# Allegro board CHOPPING_WAVE_OSC3.brd
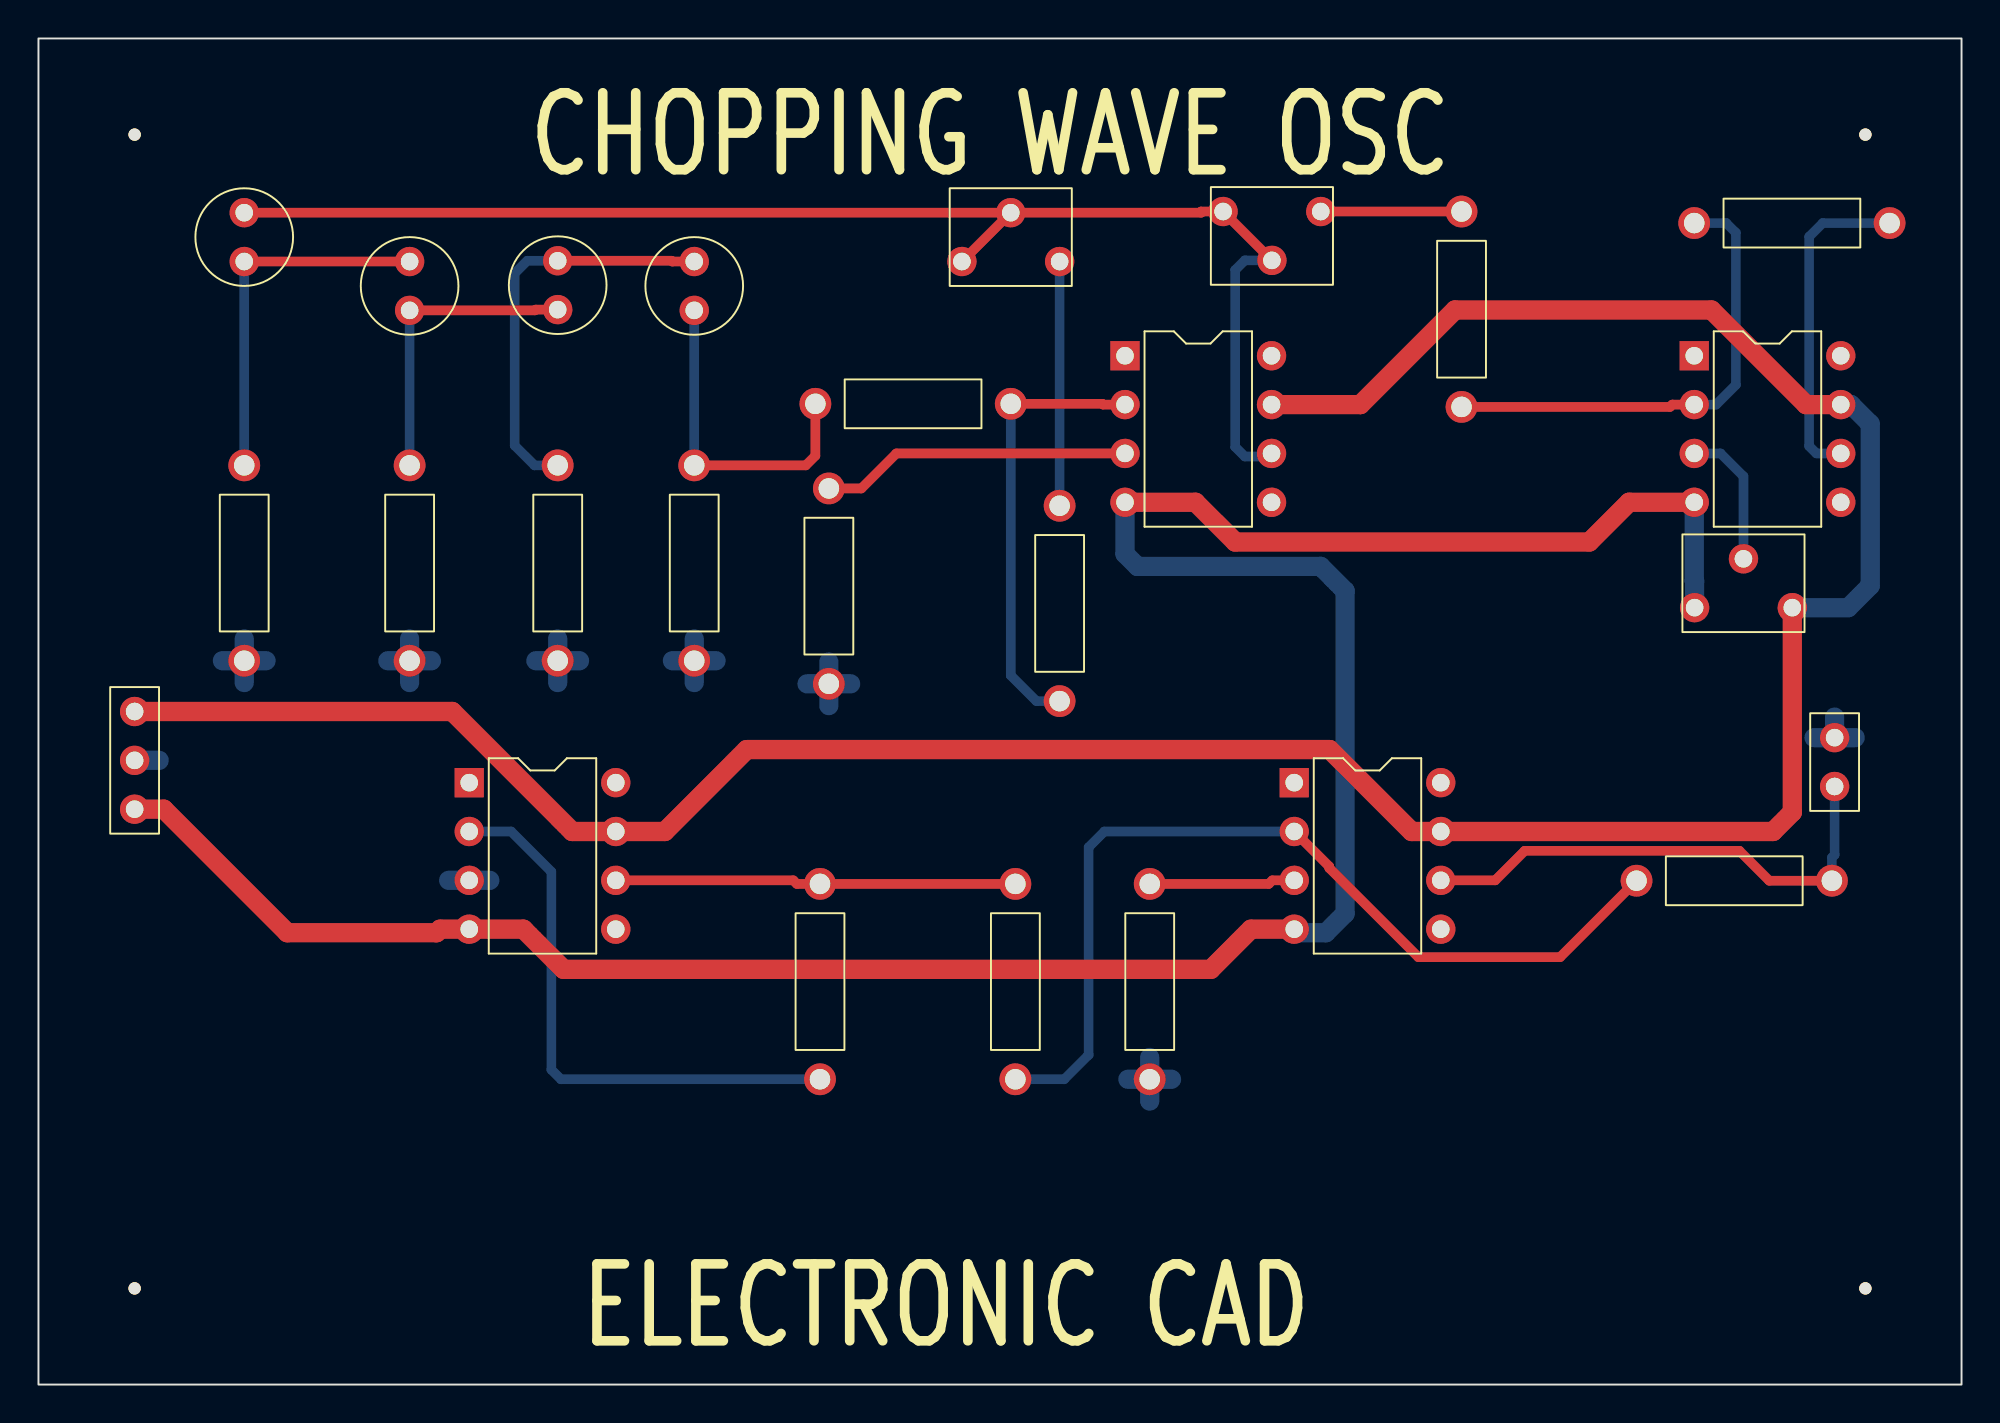
[diagram p0: board, top side]
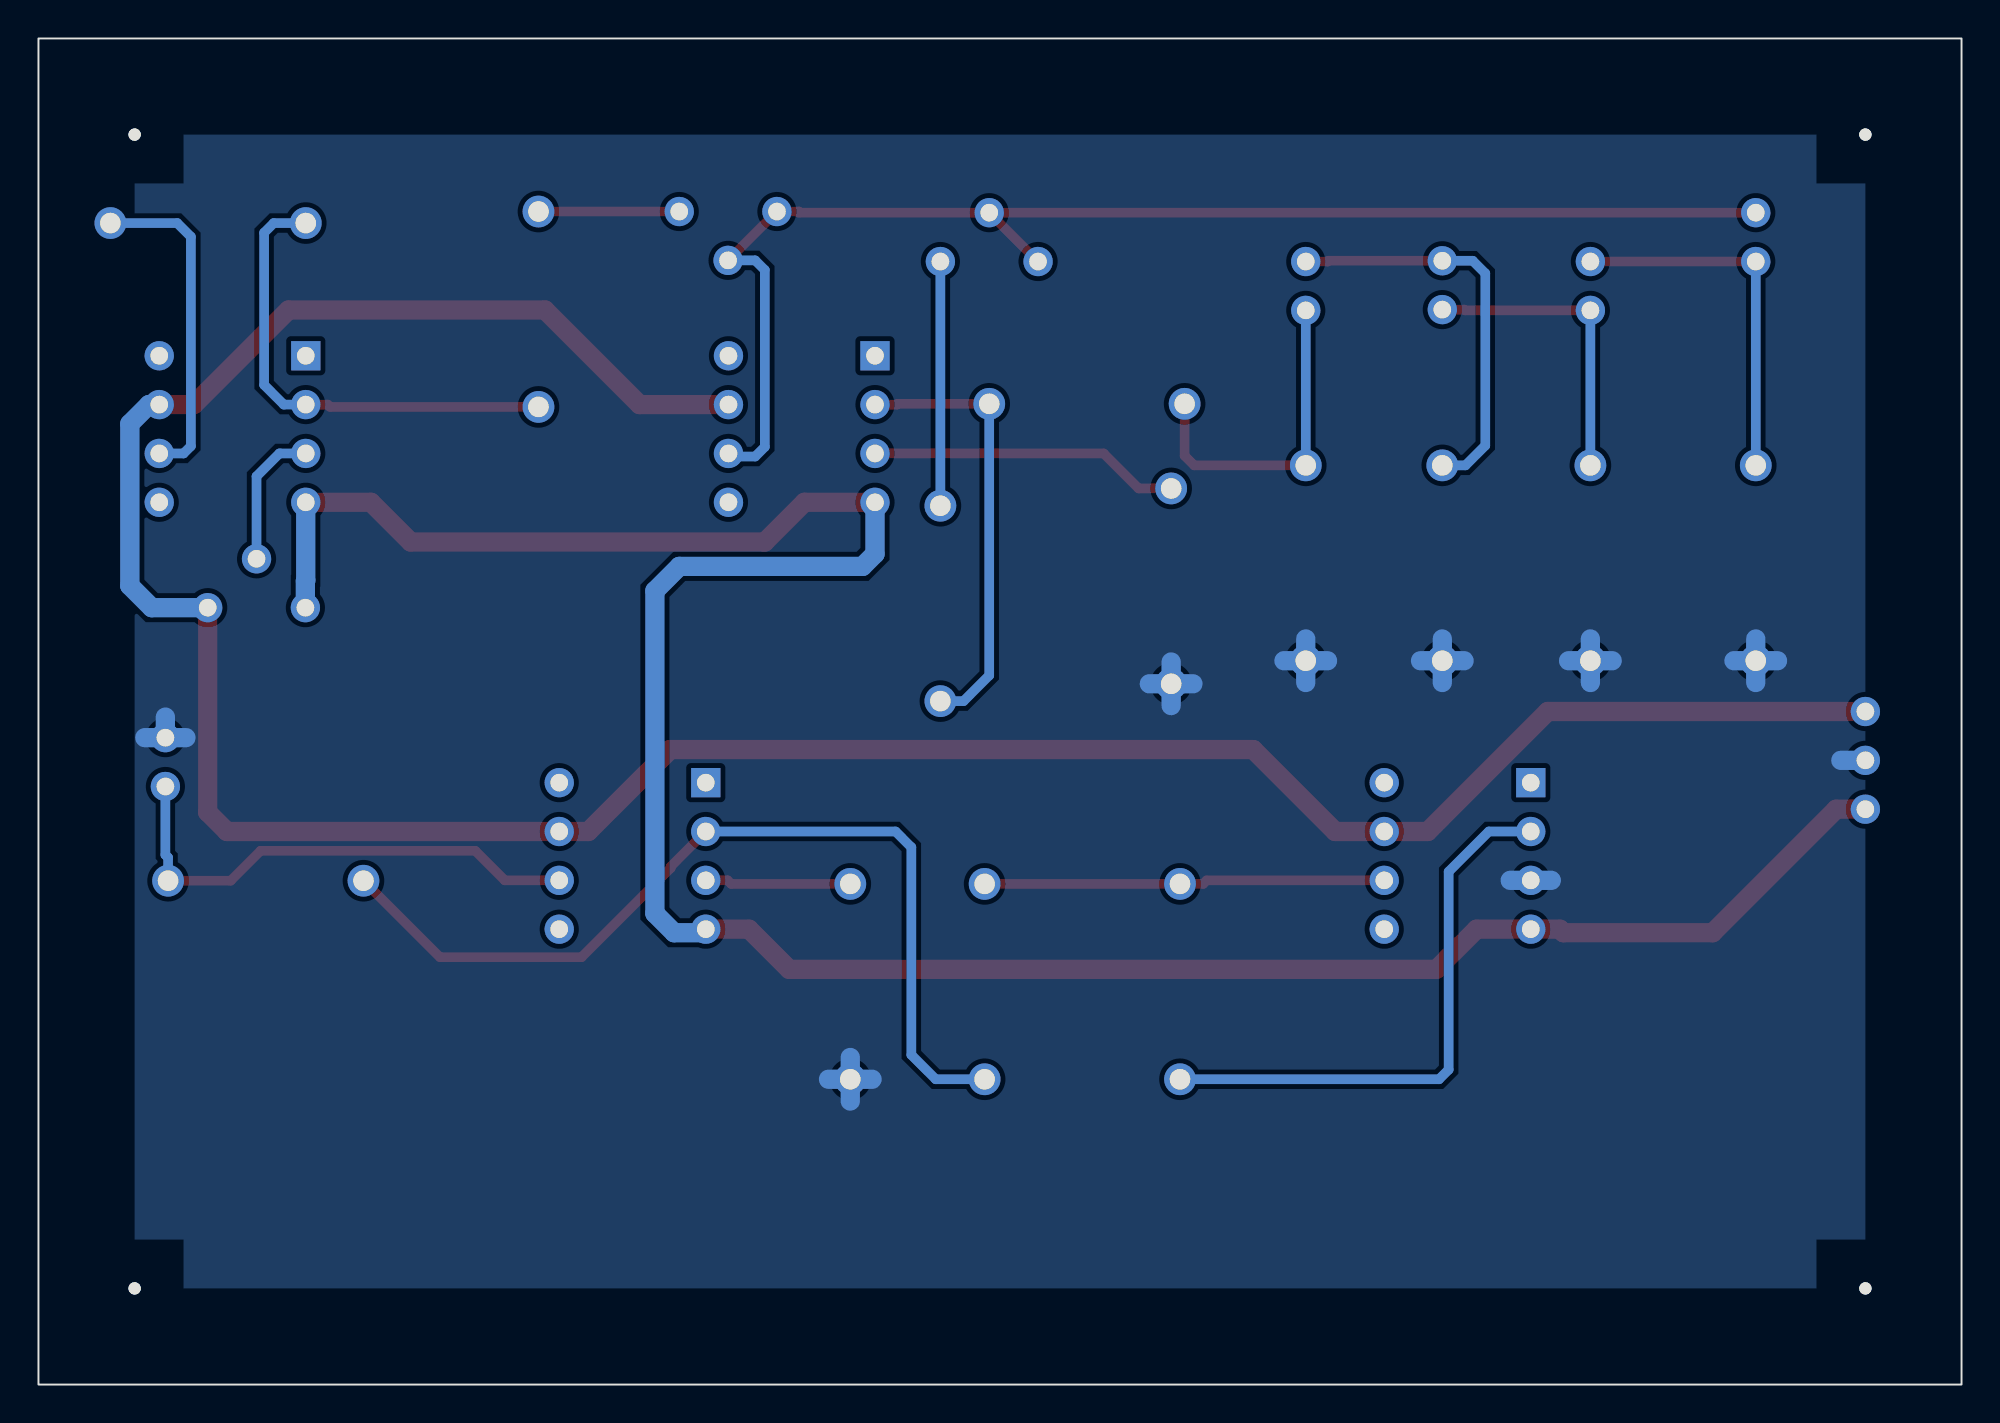
[diagram p1: board, bottom side, seen from below]

Outline 100 x 70 mm; copper layers: TOP, BOTTOM. Coordinates in mm from the lower left corner of the outline.
Outline path: rectangle 0,0 100,70

## Design rules (mm)
constraint set DEFAULT: min track width 0.5

## Placement (name value [footprint] x y rotation side)
C1  0.001uF  [CAP196]  10.7 58.4 0 top
C2  0.001uF  [CAP196]  19.3 58.4 180 top
C3  0.001uF  [CAP196]  27 55.9 0 top
C4  0.001uF  [CAP196]  34.1 58.4 180 top
J1  CON3  [JUMPER3]  5 35 270 top
J2  CON2  [JUMPER2]  93.4 31.1 90 top
NOREF  -  [unnamed]  5 65 0 top
NOREF#2  -  [#2]  0 70 0 top
NOREF#3  -  [unnamed]  5 5 0 top
NOREF#4  -  [unnamed]  95 65 0 top
NOREF#5  -  [#2]  100 0 90 top
NOREF#6  -  [unnamed]  95 5 0 top
R2  15K  [RES400]  53.1 45.7 180 top
R3  1K  [RES400]  41.1 46.6 180 top
R4  4.7K  [RES400]  10.7 47.8 180 top
R5  4.7K  [RES400]  19.3 47.8 180 top
R6  4.7K  [RES400]  27 47.8 180 top
R7  4.7K  [RES400]  34.1 47.8 180 top
R8  10K  [RES400]  40.4 51 270 top
R10  20K  [RES400]  74 61 180 top
R11  10K  [RES400]  86.1 60.4 270 top
R12  8.2K  [RES400]  40.64 15.88 0 top
R13  2.2K  [RES400]  50.8 26.04 180 top
R14  10K  [RES400]  83.1 26.2 270 top
R15  5.1K  [RES400]  57.78 26.04 180 top
U1  LF356  [DIP8_3]  56.5 53.5 0 top
U2  LF356  [DIP8_3]  86.1 53.5 0 top
U3  LF356  [DIP8_3]  22.4 31.3 0 top
U4  LF356  [DIP8_3]  65.3 31.3 0 top
VR1  470K  [RESADJ]  53.1 58.4 270 top
VR2  100K  [RESADJ]  61.6 61 90 top
VR3  10K  [RESADJ]  91.2 40.4 270 top

## Library data of the parts
C1-C4 = C: Tolerance: ***; User Part Number: ***
J1 = CON3: User Part Number: ***
J2 = CON2: User Part Number: ***
R2-R8 R10-R15 = R: Tolerance: ***; User Part Number: ***
U1-U4 = LF356_1: Tolerance: ***; User Part Number: ***
VR1-VR3 = POT: Tolerance: ***; User Part Number: ***

## Footprints (pads in the part's own frame, mm; a bottom-side part is the same pattern mirrored in y, then rotated)
CAP196
  round 1.524 hole 0.914: 1(0,0) 2(0,2.54)
DIP8_3
  rect 1.524x1.524 hole 0.914: 1(0,0)
  round 1.524 hole 0.914: 2(0,-2.54) 3(0,-5.08) 4(0,-7.62) 5(7.62,-7.62) 6(7.62,-5.08) 7(7.62,-2.54) 8(7.62,0)
JUMPER2
  round 1.524 hole 0.914: 1(0,0) 2(2.54,0)
JUMPER3
  round 1.524 hole 0.914: 1(0,0) 2(2.54,0) 3(5.08,0)
RES400
  round 1.651 hole 1.067: 1(0,0) 2(0,10.16)
RESADJ
  round 1.524 hole 0.914: 1(0,0) 2(-2.54,-2.54) 3(0,-5.08)
unnamed
  round 0.635 hole 3.175 unplated: (0,0)

## Nets
+12V: J1.1 U1.7 U2.7 U3.7 U4.7 VR3.1
-12V: J1.3 U1.4(V-) U2.4(V-) U3.4(V-) U4.4(V-) VR3.3
GND: J1.2 J2.2 R3.2 R4.2 R5.2 R6.2 R7.2 R15.2 U3.3
OUT: J2.1 R14.2 U4.6
PORTRIGHT-L: R12.1 U3.2
SIG: R11.2 U2.6
N00736: C1.1 C2.1 R4.1
N00770: C2.2 C3.1 R5.1
N00774: C3.2 C4.1 R6.1
N00778: C4.2 R7.1 R8.1
N00812: C1.2 U1.6 VR1.2(WIPER) VR1.3 VR2.1 VR2.2(WIPER)
N00890: R2.1 VR1.1
N01000: R2.2 R8.2 U1.2
N01037: R3.1 U1.3
N01247: R10.1 VR2.3
N01251: R10.2 R11.1 U2.2
N01369: U2.3 VR3.2(WIPER)
N02677: R13.2 R14.1 U4.2
N02698: R12.2 R13.1 U3.6
N02817: R15.1 U4.3

Pads without a net: U1 1 5 8; U2 1 5 8; U3 1 5 8; U4 1 5 8

## Routing (per net, layer and track width the routed paths; a pad name or vN(x,y) marks a point on that pad's centre or on a via; arc(x,y) is an arc through that point)
+12V: length 151.9
  TOP w1: U1.7 68.74,50.96 73.66,55.88 87,55.88 91.92,50.96 U2.7 ; VR3.1 91.2,29.76 90.2,28.76 U4.7 71.4,28.76 67.14,33.02 36.83,33.02 32.57,28.76 U3.7 27.76,28.76 21.52,35 J1.1
  BOTTOM w1: U2.7 94.25,50.96 95.25,49.96 95.25,41.54 94.11,40.4 VR3.1
-12V: length 136.4
  TOP w1: U4.4 63.05,23.68 60.96,21.59 27.31,21.59 25.22,23.68 U3.4 20.88,23.68 20.7,23.5 12.94,23.5 6.52,29.92 J1.3 ; U1.4 60.16,45.88 62.23,43.81 80.64,43.81 82.71,45.88 U2.4
  BOTTOM w1: U4.4 65.48,23.5 66.94,23.5 67.94,24.5 67.94,41.27 66.67,42.55 57.15,42.55 56.5,43.2 U1.4 ; U2.4 86.1,41.81 86.12,41.79 VR3.3
GND: length 33.8
  BOTTOM w1: 92.33,33.64 J2.2 ; J2.2 94.47,33.64 ; J2.2 93.4,34.71 ; R6.2 28.13,37.64 ; R6.2 25.87,37.64 ; R6.2 27,38.77 ; R6.2 27,36.51 ; 10.7,36.51 R4.2 ; R4.2 11.83,37.64 ; R4.2 10.7,38.77 ; R4.2 9.57,37.64 ; 21.33,26.22 U3.3 23.47,26.22 ; R3.2 42.23,36.44 ; R3.2 41.1,35.31 ; R3.2 41.1,37.57 ; R3.2 39.97,36.44 ; R5.2 20.43,37.64 ; R5.2 19.3,36.51 ; R5.2 18.17,37.64 ; R5.2 19.3,38.77 ; 56.65,15.88 R15.2 ; R15.2 57.78,17.01 ; R15.2 57.78,14.74 ; R15.2 58.92,15.88 ; J1.2 6.28,32.46 ; R7.2 34.1,38.77 ; R7.2 35.23,37.64 ; R7.2 34.1,36.51 ; R7.2 32.97,37.64
OUT: length 26.6
  TOP w0.5: U4.6 75.75,26.22 77.29,27.76 88.45,27.76 90,26.2 R14.2
  BOTTOM w0.5: J2.1 93.4,27.54 93.26,27.4 R14.2
PORTRIGHT-L: length 29.6
  BOTTOM w0.5: R12.1 27.17,15.88 26.67,16.38 26.67,26.67 24.58,28.76 U3.2
SIG: length 17.2
  BOTTOM w0.5: R11.2 92.78,60.4 92.08,59.69 92.08,48.8 92.45,48.42 U2.6
N00736: length 19.2
  TOP w0.5: C1.1 C2.1
  BOTTOM w0.5: C1.1 R4.1
N00770: length 15.8
  TOP w0.5: C2.2 25.82,55.86 25.86,55.9 C3.1
  BOTTOM w0.5: C2.2 R5.1
N00774: length 21.2
  TOP w0.5: C3.2 32.92,58.44 32.96,58.4 C4.1
  BOTTOM w0.5: C3.2 25.42,58.44 24.77,57.78 24.77,48.83 25.8,47.8 R6.1
N00778: length 17.3
  TOP w0.5: R8.1 40.4,48.3 39.9,47.8 R7.1
  BOTTOM w0.5: C4.2 R7.1
N00812: length 71.6
  TOP w0.5: VR2.2 VR2.1 60.46,61 60.46,60.94 VR1.2 ; C1.2 VR1.2 ; VR1.2 VR1.3
  BOTTOM w0.5: VR2.2 62.73,58.46 62.23,57.96 62.23,48.76 62.73,48.26 63.96,48.26 U1.6
N00890: length 12.7
  BOTTOM w0.5: VR1.1 R2.1
N01000: length 23.2
  TOP w0.5: R8.2 55.32,51 55.36,50.96 U1.2
  BOTTOM w0.5: R2.2 51.9,35.54 50.56,36.88 R8.2
N01037: length 16.2
  TOP w0.5: U1.3 44.61,48.42 42.79,46.6 R3.1
N01247: length 7.3
  TOP w0.5: VR2.3 R10.1
N01251: length 25
  TOP w0.5: R10.2 84.84,50.84 84.96,50.96 U2.2
  BOTTOM w0.5: U2.2 87.24,50.96 88.27,51.98 88.27,59.9 87.77,60.4 R11.1
N01369: length 7.3
  BOTTOM w0.5: VR3.2 88.66,47.23 87.47,48.42 U2.3
N02677: length 48.4
  TOP w0.5: R14.1 79.12,22.23 71.76,22.23 67.12,26.86 67.12,26.94 U4.2
  BOTTOM w0.5: U4.2 55.43,28.76 54.61,27.94 54.61,17.14 53.34,15.88 R13.2
N02698: length 20.9
  TOP w0.5: U3.6 39.25,26.22 39.44,26.04 R12.2 R13.1
N02817: length 7.6
  TOP w0.5: U4.3 64.16,26.22 63.98,26.04 R15.1

## Copper pours and planes (outline as drawn; the poured copper is in the pictures)
GND on BOTTOM: 5,5 5,65 95,65 95,5 ; 1 cut-out

## Text on the board
Ref Des/Silkscreen Top: CHOPPING WAVE OSC | ELECTRONIC CAD
DIMENSION: FIGURE | FINISHED_SIZE | 0.914 | 1.067 | 3.175 | DRILL CHART: TOP to BOTTOM | ALL UNITS ARE IN MILLIMETERS | PLATED | NON-PLATED | QTY | 54 | 26 | 4
